# EAGLE board kvetinac_driver_board (EAGLE 6.3)
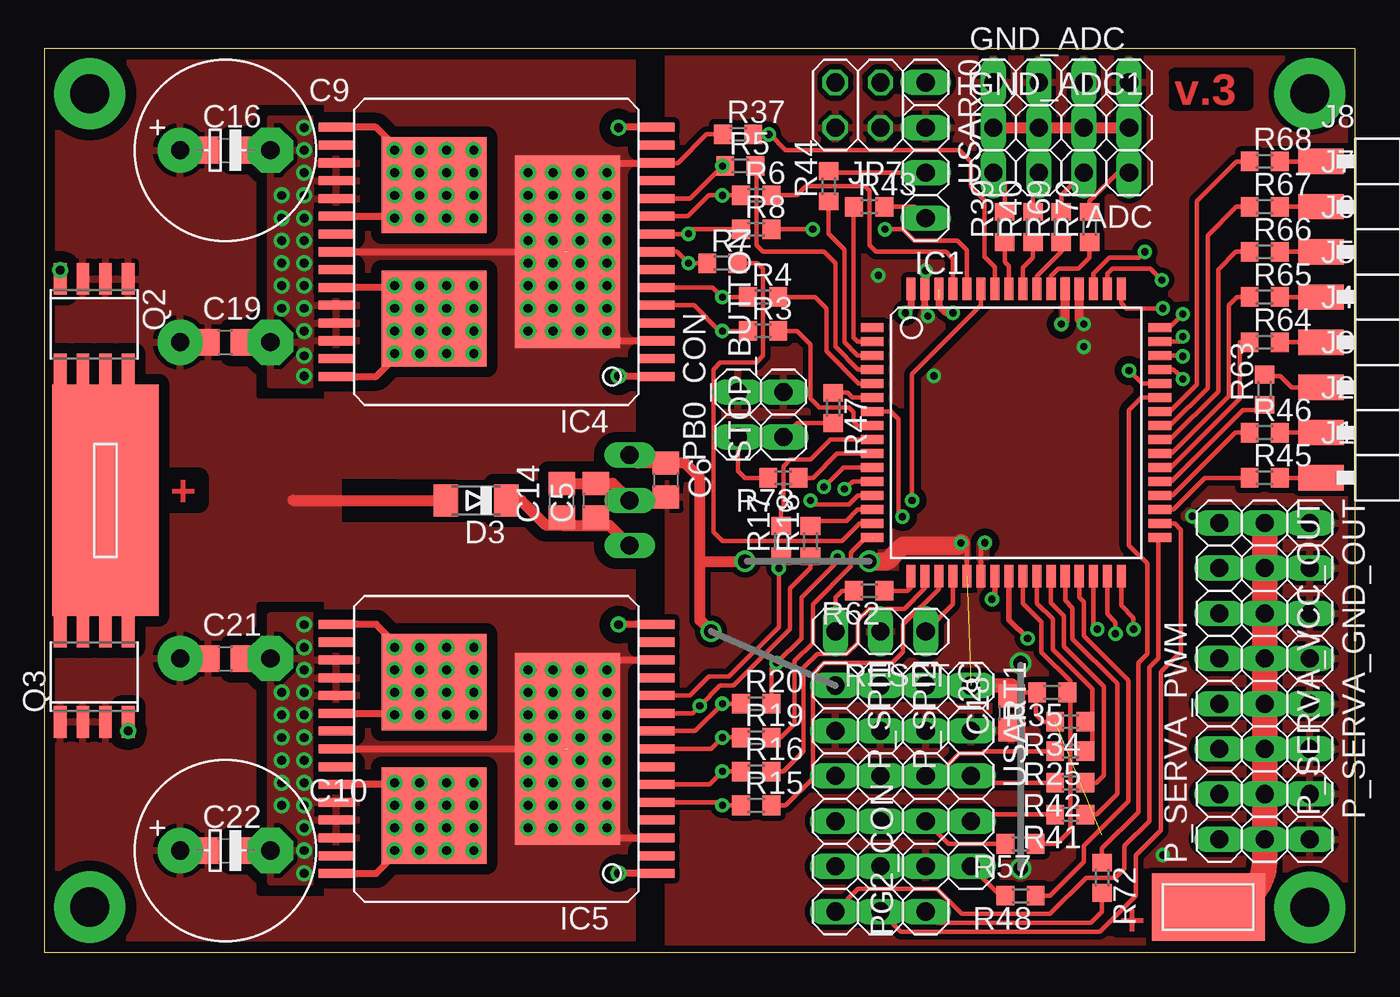
[diagram p0: board, top side]
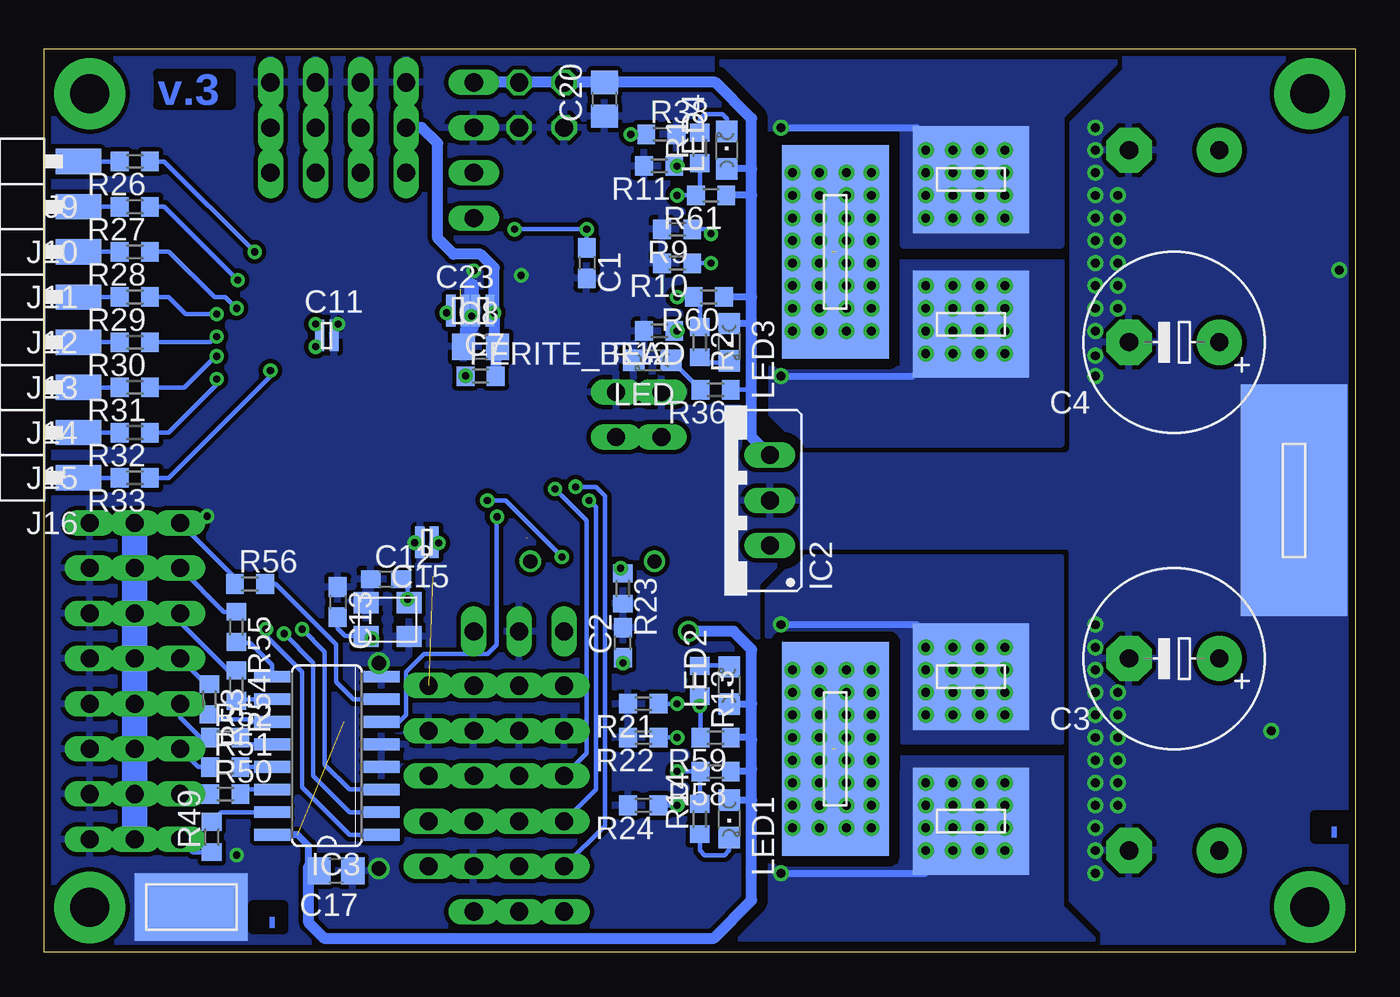
[diagram p1: board, bottom side, seen from below]

Size 73.66 x 50.8 mm. Coordinates in mm from the lower left corner, seen from the top.
Outline: 0,0 73.66,0 73.66,50.8 0,50.8 0,0
Copper layers (1*16): Top 0.035mm / dielectric 1.5mm / Bottom 0.035mm
Design rules "default *": minimum track width 0.2mm, minimum drill 0.4mm, track to track 0.2mm, track to pad 0.2mm, pad to pad 0.2mm, via to via 0.2mm, smd to smd 0mil, copper to edge 0.4mm, drill to drill 0.4mm, minimum pad ring 0.2mm, minimum via ring 0.2mm, stop-mask expansion 2mil, vias tented up to drill 0.4mm, thermal gap 10mil

## Footprints (pad centres in the part's own frame; a part is rotated, then mirrored left to right if it is on the bottom)
CABEL_SMD = smd 13 x 6: P$1 0,0
1X04 = drill 1.016 long: 1 -3.81,0; 2 -1.27,0; 3 1.27,0; 4 3.81,0
C0603 = smd 1.1 x 1: 1 -0.85,0; 2 0.85,0
E5-10,5 = drill 1.016 pad 2.54: + -2.54,0 | drill 1.016 pad 2.54 octagon: - 2.54,0
C0805 = smd 1.3 x 1.5: 1 -0.95,0; 2 0.95,0
C0306 = smd 0.508 x 1.778: 1 -0.401,0; 2 0.401,0
MINIMELF = smd 1.4 x 1.8: A 1.7,0; C -1.7,0
R0603 = smd 1 x 1.1: 1 -0.85,0; 2 0.85,0
TQFP64 = smd 1.27 x 0.508: 1 -8.077,5.905; 2 -8.077,5.118; 3 -8.077,4.331; 4 -8.077,3.543; 5 -8.077,2.756; 6 -8.077,1.968; 7 -8.077,1.181; 8 -8.077,0.394; 9 -8.077,-0.394; 10 -8.077,-1.181; 11 -8.077,-1.968; 12 -8.077,-2.756; 13 -8.077,-3.543; 14 -8.077,-4.331; 15 -8.077,-5.118; 16 -8.077,-5.905; 33 8.077,-5.905; 34 8.077,-5.118; 35 8.077,-4.331; 36 8.077,-3.543; 37 8.077,-2.756; 38 8.077,-1.968; 39 8.077,-1.181; 40 8.077,-0.394; 41 8.077,0.394; 42 8.077,1.181; 43 8.077,1.968; 44 8.077,2.756; 45 8.077,3.543; 46 8.077,4.331; 47 8.077,5.118; 48 8.077,5.905 | smd 0.508 x 1.27: 17 -5.905,-8.077; 18 -5.118,-8.077; 19 -4.331,-8.077; 20 -3.543,-8.077; 21 -2.756,-8.077; 22 -1.968,-8.077; 23 -1.181,-8.077; 24 -0.394,-8.077; 25 0.394,-8.077; 26 1.181,-8.077; 27 1.968,-8.077; 28 2.756,-8.077; 29 3.543,-8.077; 30 4.331,-8.077; 31 5.118,-8.077; 32 5.905,-8.077; 49 5.905,8.077; 50 5.118,8.077; 51 4.331,8.077; 52 3.543,8.077; 53 2.756,8.077; 54 1.968,8.077; 55 1.181,8.077; 56 0.394,8.077; 57 -0.394,8.077; 58 -1.181,8.077; 59 -1.968,8.077; 60 -2.756,8.077; 61 -3.543,8.077; 62 -4.331,8.077; 63 -5.118,8.077; 64 -5.905,8.077
78XXS = drill 1.016 long: GND 0,-2.54; IN -2.54,-2.54; OUT 2.54,-2.54
SO16 = smd 0.66 x 2.032: 1 -4.445,-3.073; 2 -3.175,-3.073; 3 -1.905,-3.073; 4 -0.635,-3.073; 5 0.635,-3.073; 6 1.905,-3.073; 7 3.175,-3.073; 8 4.445,-3.073; 9 4.445,3.073; 10 3.175,3.073; 11 1.905,3.073; 12 0.635,3.073; 13 -0.635,3.073; 14 -1.905,3.073; 15 -3.175,3.073; 16 -4.445,3.073
MULTIPOWERSO-30 = smd 0.508 x 2: 1 -7,-9; 2 -6,-9; 3 -5,-9; 4 -4,-9; 5 -3,-9; 6 -2,-9; 7 -1,-9; 8 0,-9; 9 1,-9; 10 2,-9; 11 3,-9; 12 4,-9; 13 5,-9; 14 6,-9; 15 7,-9; 16 7,9; 17 6,9; 18 5,9; 19 4,9; 20 3,9; 21 2,9; 22 1,9; 23 0,9; 24 -1,9; 25 -2,9; 26 -3,9; 27 -4,9; 28 -5,9; 29 -6,9; 30 -7,9 | smd 5.4 x 5.9: OUTA -3.75,3.5; OUTB 3.75,3.5 | smd 10.8 x 5.9: VCC 0,-4
1X01/SMD = smd 1.422 x 2.54: 1 0,-1.27
2X02 = drill 1.016 octagon: 1 -1.27,-1.27; 2 -1.27,1.27; 3 1.27,-1.27; 4 1.27,1.27
CHIPLED_0805 = smd 1.2 x 1.2: A 0,-1.05; C 0,1.05
CABEL_SMD_6.5*6MM = smd 6.5 x 6: P$1 0,0
1X08 = drill 1.016 long: 1 -8.89,0; 2 -6.35,0; 3 -3.81,0; 4 -1.27,0; 5 1.27,0; 6 3.81,0; 7 6.35,0; 8 8.89,0
1X06 = drill 1.016 long: 1 -6.35,0; 2 -3.81,0; 3 -1.27,0; 4 1.27,0; 5 3.81,0; 6 6.35,0
1X02 = drill 1.016 long: 1 -1.27,0; 2 1.27,0
ABM8 = smd 1.4 x 1.2: GND$1 -1.2,0.95; GND$2 1.2,-0.95; Q$1 -1.2,-0.95; Q$2 1.2,0.95
SO08-IRF = smd 0.72 x 1.78: 1 -1.905,-2.543; 2 -0.635,-2.543; 3 0.635,-2.543; 4 1.905,-2.543; 5 1.905,2.543; 6 0.635,2.543; 7 -0.635,2.543; 8 -1.905,2.543
1X03 = drill 1.016 long: 1 -2.54,0; 2 0,0; 3 2.54,0
1X05 = drill 1.016 long: 1 -5.08,0; 2 -2.54,0; 3 0,0; 4 2.54,0; 5 5.08,0
CABEL_SMD_0.25*0.15 = smd 6.35 x 3.81: P$1 0,0
CABEL_SMD_12*6MM = smd 12 x 6: P$1 0,0

## Placement (x,y rotation side)
0V  CABEL_SMD  [CABEL_SMD]  3.43,25.4 90 bottom
ADC  [1X04]  57.15,43.81 180 top
C1  33nF  [C0603]  43.18,38.73 270 bottom
C2  33nF  [C0603]  41.15,17.4 90 bottom
C3  1500uF/25V  [E5-10,5]  10.16,16.51 180 bottom
C4  1500uF/25V  [E5-10,5]  10.16,34.29 180 bottom
C5  4,7uF/25V  [C0805]  30.99,25.4 90 top
C6  4,7uF/6,3V  [C0805]  34.92,26.54 270 top
C7  100nF/6,3V  [C0306]  49.02,36.07 180 bottom
C8  4,7uF/6,3V  [C0805]  49.15,34.04 0 bottom
C9  1500uF/25V  [E5-10,5]  10.16,45.09 0 top
C10  1500uF/25V  [E5-10,5]  10.16,5.71 0 top
C11  100nF/6,3V  [C0306]  57.78,34.67 0 bottom
C12  18pF/6,3V  [C0603]  54.47,20.97 0 bottom
C13  18pF/6,3V  [C0603]  57.18,19.68 270 bottom
C14  4,7uF/25V  [C0805]  29.08,25.4 90 top
C15  100nF/6,3V  [C0306]  52.16,23.04 180 bottom
C16  4,7uF/25V  [C0805]  10.16,45.09 0 top
C17  4,7uF/6,3V  [C0805]  57.28,4.57 180 bottom
C18  4,7uF/6,3V  [C0805]  54.36,13.46 90 top
C19  4,7uF/25V  [C0805]  10.16,34.29 0 top
C20  4,7uF/6,3V  [C0805]  42.18,47.94 90 bottom
C21  4,7uF/25V  [C0805]  10.16,16.51 0 top
C22  4,7uF/25V  [C0805]  10.16,5.71 0 top
C23  100nF/6,3V  [C0306]  50.42,36.07 0 bottom
D3  1A/25+V  [MINIMELF]  24.26,25.4 180 top
FERITE_BEAD  10uH  [R0603]  49.15,32.38 0 bottom
GND_ADC  [1X04]  57.15,48.9 0 top
GND_ADC1  [1X04]  57.15,46.35 0 top
I2C  [1X04]  49.53,11.18 270 top
IC1  MEGA128-A  [TQFP64]  54.61,29.21 0 top
IC2  [78XXS]  35.43,25.4 90 bottom
IC3  74HC238D  [SO16]  57.78,11.05 90 bottom
IC4  VNH2SP30  [MULTIPOWERSO-30]  25.4,39.37 90 top
IC5  VNH2SP30  [MULTIPOWERSO-30]  25.4,11.43 90 top
J1  PINHD-1X1SMD2.4MM  [1X01/SMD]  73.03,26.67 270 top
J2  PINHD-1X1SMD2.4MM  [1X01/SMD]  73.03,29.21 270 top
J3  PINHD-1X1SMD2.4MM  [1X01/SMD]  73.03,31.75 270 top
J4  PINHD-1X1SMD2.4MM  [1X01/SMD]  73.03,34.29 270 top
J5  PINHD-1X1SMD2.4MM  [1X01/SMD]  73.03,36.83 270 top
J6  PINHD-1X1SMD2.4MM  [1X01/SMD]  73.03,39.37 270 top
J7  PINHD-1X1SMD2.4MM  [1X01/SMD]  73.03,41.91 270 top
J8  PINHD-1X1SMD2.4MM  [1X01/SMD]  73.03,44.45 270 top
J9  PINHD-1X1SMD2.4MM  [1X01/SMD]  73.03,44.45 90 bottom
J10  PINHD-1X1SMD2.4MM  [1X01/SMD]  73.03,41.91 90 bottom
J11  PINHD-1X1SMD2.4MM  [1X01/SMD]  73.03,39.37 90 bottom
J12  PINHD-1X1SMD2.4MM  [1X01/SMD]  73.03,36.83 90 bottom
J13  PINHD-1X1SMD2.4MM  [1X01/SMD]  73.03,34.29 90 bottom
J14  PINHD-1X1SMD2.4MM  [1X01/SMD]  73.03,31.75 90 bottom
J15  PINHD-1X1SMD2.4MM  [1X01/SMD]  73.03,29.21 90 bottom
J16  PINHD-1X1SMD2.4MM  [1X01/SMD]  73.03,26.67 90 bottom
JP7  +5V  [2X02]  45.72,47.62 180 top
LED  GREEN  [CHIPLED_0805]  39.5,33.27 90 bottom
LED1  RED  [CHIPLED_0805]  35.18,7.49 180 bottom
LED2  RED  [CHIPLED_0805]  35.18,14.99 0 bottom
LED3  RED  [CHIPLED_0805]  35.18,34.29 180 bottom
LED4  RED  [CHIPLED_0805]  35.31,45.09 0 bottom
OUTA_1  CABEL_SMDCABEL_SMD_6.5*6MM  [CABEL_SMD_6.5*6MM]  21.59,35.31 180 bottom
OUTA_2  CABEL_SMDCABEL_SMD_6.5*6MM  [CABEL_SMD_6.5*6MM]  21.59,7.37 0 bottom
OUTB_1  CABEL_SMDCABEL_SMD_6.5*6MM  [CABEL_SMD_6.5*6MM]  21.59,43.43 0 bottom
OUTB_2  CABEL_SMDCABEL_SMD_6.5*6MM  [CABEL_SMD_6.5*6MM]  21.59,15.49 180 bottom
P_SERVA_GND_OUT  [1X08]  71.12,15.24 270 top
P_SERVA_PWM  [1X08]  66.04,15.24 90 top
P_SERVA_VCC_OUT  [1X08]  68.58,15.24 270 top
P_SPI1  [1X06]  44.45,8.64 270 top
P_SPI2  [1X06]  46.99,8.64 270 top
PB0_CON  [1X02]  38.99,30.23 90 top
PG2_CON  [1X02]  49.53,3.56 90 top
Q1  16MHz  [ABM8]  54.37,18.7 180 bottom
Q2  TPCA8128SO8  [SO08-IRF]  2.79,35.31 180 top
Q3  TPCA8128SO8  [SO08-IRF]  2.79,15.49 0 top
R1  2k2  [R0603]  36.83,45.21 90 bottom
R2  2k2  [R0603]  36.83,34.29 270 bottom
R3  1k  [R0603]  40.39,34.92 0 top
R4  1k  [R0603]  40.39,36.83 0 top
R5  1k  [R0603]  39.12,44.2 0 top
R6  1k  [R0603]  40.01,42.55 0 top
R7  1k  [R0603]  38.1,38.73 0 top
R8  10k  [R0603]  40.01,40.64 0 top
R9  1k5  [R0603]  38.1,40.64 180 bottom
R10  22k  [R0603]  38.1,38.73 180 bottom
R11  22k  [R0603]  39.12,44.2 180 bottom
R12  22k  [R0603]  39.12,34.92 180 bottom
R13  2k2  [R0603]  36.83,15.24 270 bottom
R14  2k2  [R0603]  36.83,7.49 90 bottom
R15  1k  [R0603]  40.01,8.26 0 top
R16  1k  [R0603]  40.01,10.16 0 top
R17  1k  [R0603]  41.4,23.11 90 top
R18  1k  [R0603]  43.05,23.11 90 top
R19  1k  [R0603]  40.01,12.06 0 top
R20  10k  [R0603]  40.01,13.97 0 top
R21  1k5  [R0603]  40.01,13.97 180 bottom
R22  22k  [R0603]  40.01,12.06 180 bottom
R23  22k  [R0603]  41.15,20.45 270 bottom
R24  22k  [R0603]  40.01,8.26 180 bottom
R25  220  [R0603]  57.66,11.3 180 top
R26  220  [R0603]  68.58,44.45 180 bottom
R27  220  [R0603]  68.58,41.91 180 bottom
R28  220  [R0603]  68.58,39.37 180 bottom
R29  220  [R0603]  68.58,36.83 180 bottom
R30  220  [R0603]  68.58,34.29 180 bottom
R31  220  [R0603]  68.58,31.75 180 bottom
R32  220  [R0603]  68.58,29.21 180 bottom
R33  220  [R0603]  68.58,26.67 180 bottom
R34  4k7  [R0603]  57.66,12.95 180 top
R35  4k7  [R0603]  56.64,14.61 180 top
R36  1k  [R0603]  35.94,31.62 180 bottom
R37  33k  [R0603]  38.99,45.97 0 top
R38  10k  [R0603]  38.99,45.97 0 bottom
R39  220  [R0603]  53.98,40.77 90 top
R40  220  [R0603]  55.56,40.77 90 top
R41  220  [R0603]  57.66,7.75 180 top
R42  220  [R0603]  57.66,9.53 180 top
R43  220  [R0603]  46.35,41.91 0 top
R44  220  [R0603]  44.07,43.05 90 top
R45  220  [R0603]  68.58,26.67 0 top
R46  220  [R0603]  68.58,29.21 0 top
R47  220  [R0603]  44.32,30.6 270 top
R48  220  [R0603]  54.86,3.17 180 top
R49  470R  [R0603]  64.26,6.48 90 bottom
R50  470R  [R0603]  63.5,8.89 0 bottom
R51  470R  [R0603]  63.5,10.41 0 bottom
R52  470R  [R0603]  63.5,12.06 0 bottom
R53  470R  [R0603]  64.39,14.22 270 bottom
R54  470R  [R0603]  62.87,14.99 270 bottom
R55  470R  [R0603]  62.87,18.29 270 bottom
R56  470R  [R0603]  62.1,20.7 0 bottom
R57  220  [R0603]  54.86,6.1 180 top
R58  3k3  [R0603]  35.94,10.16 180 bottom
R59  3k3  [R0603]  35.94,12.06 180 bottom
R60  3k3  [R0603]  36.32,36.83 180 bottom
R61  3k3  [R0603]  36.2,42.55 180 bottom
R62  220  [R0603]  46.35,20.32 180 top
R63  220  [R0603]  68.58,31.62 90 top
R64  220  [R0603]  68.58,34.29 0 top
R65  220  [R0603]  68.58,36.83 0 top
R66  220  [R0603]  68.58,39.37 0 top
R67  220  [R0603]  68.58,41.91 0 top
R68  220  [R0603]  68.58,44.45 0 top
R69  220  [R0603]  57.15,40.77 90 top
R70  220  [R0603]  58.74,40.77 90 top
R72  220  [R0603]  59.44,4.19 270 top
R73  220  [R0603]  41.53,26.67 180 top
RESET  [1X03]  46.99,18.03 180 top
STOP_BUTTON  [1X02]  41.53,30.23 90 top
USART0  [1X04]  49.53,45.09 270 top
USART1  [1X05]  52.07,9.91 270 top
VCC  CABEL_SMD  [CABEL_SMD]  3.43,25.4 270 top
VCC1  CABEL_SMD0.2*0.15  [CABEL_SMD_0.25*0.15]  65.41,2.54 0 top
VCC2  CABEL_SMD0.2*0.15  [CABEL_SMD_0.25*0.15]  65.41,2.54 0 bottom
VCCA  CABEL_SMDCABEL_SMD_12*6MM  [CABEL_SMD_12*6MM]  29.21,39.37 270 bottom
VCCB  CABEL_SMDCABEL_SMD_12*6MM  [CABEL_SMD_12*6MM]  29.21,11.43 270 bottom

## Library data of the parts
0V OUTA_1 OUTA_2 OUTB_1 OUTB_2 VCC VCC1 VCC2 VCCA VCCB = cabel_smd
ADC GND_ADC GND_ADC1 I2C JP7 P_SERVA_GND_OUT P_SERVA_PWM P_SERVA_VCC_OUT P_SPI1 P_SPI2 PB0_CON PG2_CON RESET STOP_BUTTON USART0 USART1 = pinhead
C1-C6 C8-C10 C12-C14 C16-C22 FERITE_BEAD R1-R70 R72 R73 = rcl
C7 C11 C15 C23 = rcl_upravena
D3 = diode
IC1 = avr
IC2 = v-reg
IC3 = 74
IC4 IC5 Q2 Q3 = vacha
J1-J16 = pinhead_smd
LED LED1-LED4 = led
Q1 = crystal

## Nets
+5V: C6.1 C11.1 C15.1 C17.2 C18.2 C20.2 FERITE_BEAD.1 I2C.1 IC1.21 IC1.52 IC2.OUT IC3.16 JP7.1 JP7.3 LED1.A LED2.A LED3.A LED4.A P_SPI1.1 P_SPI2.1 R34.2 R35.2 R36.1 R58.1 R59.1 R60.1 R61.1 USART0.1 USART1.1
A0: IC1.51 R26.1
A1: IC1.50 R27.1
A2: IC1.49 R28.1
A3: IC1.48 R29.1
A4: IC1.47 R30.1
A5: IC1.46 R31.1
A6: IC1.45 R32.1
A7: IC1.44 R33.1
ADC4: IC1.57 R39.1
ADC5: IC1.56 R40.1
ADC6: IC1.55 R69.1
ADC7: IC1.54 R70.1
AREF: C23.1 IC1.62
BAT: IC1.58 R37.2 R38.1
C0: IC1.35 R45.1
C1: IC1.36 R46.1
C2: IC1.37 R63.1
C3: IC1.38 R64.1
C4: IC1.39 R65.1
C5: IC1.40 R66.1
C6: IC1.41 R67.1
C7: IC1.42 R68.1
CS_L: C1.1 IC1.60 R8.2
CS_R: C2.1 IC1.59 R20.2
DIAG_LA: IC1.5 R4.2
DIAG_LB: IC1.61 R6.2
DIAG_RA: IC1.18 R16.2
DIAG_RB: IC1.14 R18.2
GND: 0V.P$1 C1.2 C2.2 C3.- C4.- C5.2 C6.2 C7.2 C8.1 C9.- C10.- C11.2 C12.1 C13.1 C14.2 C15.2 C16.2 C17.1 C18.1 C19.2 C20.1 C21.2 C22.2 C23.2 GND_ADC.1 GND_ADC.2 GND_ADC.3 GND_ADC.4 I2C.2 IC1.22 IC1.53 IC1.63 IC2.GND IC3.4 IC3.5 IC3.8 IC4.18 IC4.19 IC4.20 IC4.26 IC4.27 IC4.28 IC5.18 IC5.19 IC5.20 IC5.26 IC5.27 IC5.28 JP7.2 JP7.4 LED.C P_SERVA_GND_OUT.1 P_SERVA_GND_OUT.2 P_SERVA_GND_OUT.3 P_SERVA_GND_OUT.4 P_SERVA_GND_OUT.5 P_SERVA_GND_OUT.6 P_SERVA_GND_OUT.7 P_SERVA_GND_OUT.8 P_SPI1.2 P_SPI2.2 PB0_CON.2 PG2_CON.2 Q1.GND$1 Q1.GND$2 Q2.4 Q3.4 R9.2 R10.2 R11.2 R12.2 R21.2 R22.2 R23.2 R24.2 R38.2 RESET.2 STOP_BUTTON.2 USART0.2 USART1.2 VCC2.P$1
I2C_CL: IC1.25 R35.1 R57.1
I2C_DA: IC1.26 R25.1 R34.1
IN_LA: IC1.8 R3.2
IN_LB: IC1.4 R5.2
IN_RA: IC1.19 R15.2
IN_RB: IC1.9 R17.2
MISO: IC1.13 P_SPI1.4 P_SPI2.4
MOSI: IC1.12 P_SPI1.3 P_SPI2.3
N$1: IC4.5 R3.1 R12.1
N$2: IC5.10 R13.2 R18.1 R59.2
N$3: IC4.11 R5.1 R11.1
N$4: IC5.6 R14.2 R16.1 R58.2
N$5: IC4.8 R7.1 R10.1
N$6: IC4.9 R8.1 R9.1
N$7: IC4.6 R2.1 R4.1 R60.2
N$8: C12.2 IC1.23 Q1.Q$1
N$9: C13.2 IC1.24 Q1.Q$2
N$11: IC5.5 R15.1 R24.1
N$12: IC4.10 R1.1 R6.1 R61.2
N$13: IC5.11 R17.1 R23.1
N$14: LED1.C R14.1
N$15: IC5.8 R19.1 R22.1
N$16: IC5.9 R20.1 R21.1
N$18: PG2_CON.1 R72.2
N$19: ADC.3 R40.2
N$20: LED2.C R13.1
N$21: LED.A R36.2
N$22: J9.1 R26.2
N$23: J10.1 R27.2
N$24: J11.1 R28.2
N$25: J12.1 R29.2
N$26: J13.1 R30.2
N$27: J14.1 R31.2
N$28: J15.1 R32.2
N$29: J16.1 R33.2
N$30: R41.2 USART1.4
N$31: R42.2 USART1.3
N$32: R43.2 USART0.4
N$33: R44.2 USART0.3
N$34: ADC.4 R39.2
N$35: R48.2 USART1.5
N$36: R47.2 STOP_BUTTON.1
N$37: LED3.C R2.2
N$38: LED4.C R1.2
N$39: IC3.15 R49.2
N$40: PB0_CON.1 R73.2
N$41: IC3.14 R50.2
N$42: IC3.13 R51.2
N$43: IC3.12 R52.2
N$44: IC3.11 R53.2
N$45: IC3.10 R54.2
N$46: IC3.9 R55.2
N$47: IC3.7 R56.2
N$48: P_SERVA_PWM.8 R56.1
N$49: P_SERVA_PWM.7 R55.1
N$50: P_SERVA_PWM.6 R54.1
N$51: P_SERVA_PWM.5 R53.1
N$52: P_SERVA_PWM.4 R52.1
N$53: P_SERVA_PWM.3 R51.1
N$54: P_SERVA_PWM.2 R50.1
N$55: P_SERVA_PWM.1 R49.1
N$56: R62.2 RESET.3
N$57: I2C.3 R25.2
N$58: ADC.2 R69.2
N$59: ADC.1 R70.2
N$60: I2C.4 R57.2
N$62: J1.1 R45.2
N$66: Q2.5 Q2.6 Q2.7 Q2.8 Q3.5 Q3.6 Q3.7 Q3.8 VCC.P$1
N$67: J2.1 R46.2
N$68: J3.1 R63.2
N$69: J4.1 R64.2
N$70: J5.1 R65.2
N$71: J6.1 R66.2
N$72: J7.1 R67.2
N$73: J8.1 R68.2
N$88: C5.1 C14.1 D3.C IC2.IN
OUTA_1: IC4.1 IC4.25 IC4.30 IC4.OUTA OUTA_1.P$1
OUTA_2: IC5.1 IC5.25 IC5.30 IC5.OUTA OUTA_2.P$1
OUTB_1: IC4.15 IC4.16 IC4.21 IC4.OUTB OUTB_1.P$1
OUTB_2: IC5.15 IC5.16 IC5.21 IC5.OUTB OUTB_2.P$1
PB0: IC1.10 R73.1
PG2: IC1.43 R72.1
PWM_1: IC1.17 R62.1
PWM_L: IC1.15 R7.2
PWM_R: IC1.16 R19.2
RESET: IC1.20 RESET.1
RXD: IC1.2 R43.1
RXD1: IC1.27 R42.1
SA0: IC1.30 IC3.3
SA1: IC1.31 IC3.2
SA2: IC1.32 IC3.1
SCK: IC1.11 P_SPI1.5 P_SPI2.5
SEN: IC1.7 IC3.6
SERVA_VCC: P_SERVA_VCC_OUT.1 P_SERVA_VCC_OUT.2 P_SERVA_VCC_OUT.3 P_SERVA_VCC_OUT.4 P_SERVA_VCC_OUT.5 P_SERVA_VCC_OUT.6 P_SERVA_VCC_OUT.7 P_SERVA_VCC_OUT.8 VCC1.P$1
SPI_SEL1: IC1.34 P_SPI2.6
SPI_SEL2: IC1.33 P_SPI1.6
STOP: IC1.6 R47.1
TXD: IC1.3 R44.1
TXD1: IC1.28 R41.1
USART1_PIN: IC1.29 R48.1
VCC: C3.+ C4.+ C9.+ C10.+ C16.1 C19.1 C21.1 C22.1 D3.A IC4.3 IC4.13 IC4.23 IC4.VCC IC5.3 IC5.13 IC5.23 IC5.VCC Q2.1 Q2.2 Q2.3 Q3.1 Q3.2 Q3.3 R37.1 VCCA.P$1 VCCB.P$1
VPP: C7.1 C8.2 FERITE_BEAD.2 GND_ADC1.1 GND_ADC1.2 GND_ADC1.3 GND_ADC1.4 IC1.64

## Tracks (layer width: path | path; a pad name or v marks a point on that pad's centre or on a via)
+5V  (via drill 0.4, 0.8)  (2 unrouted)
  Top 0.254: R34.2 56.13,12.95 55.73,13.36 55.73,14.48 R35.2 54.36,14.61 C18.2 | IC1.21 51.85,23 v51.51,23
  Top 0.508: IC1.52 58.15,35.57 v58.42,35.31
  Top 0.61: 54.36,14.99 54.36,14.61 | IC2.OUT 33.34,27.49 C6.1 36.01,27.49 36.83,26.67 36.83,21.84 | 36.83,21.84 36.83,18.67 v37.47,18.03 | v39.37,21.97 36.96,21.97 36.83,21.84
  Top 0.813: 54.36,14.99 USART1.1 I2C.1 P_SPI2.1 P_SPI1.1
  Top 1.016: v46.35,21.97 47.37,21.97 48.26,22.86 51.37,22.86 v51.51,23
  Bottom 0.254: 51.8,22.97 51.8,23 v51.51,23 | R36.1 34.16,31.62 33.91,31.37
  Bottom 0.406: 33.91,36.83 R60.1 | 33.91,35.34 LED3.A | 33.91,44.03 LED4.A | 33.91,42.55 R61.1 | 33.91,8.54 LED1.A | LED2.A 34.07,13.94 33.91,13.97 | R59.1 34.16,12.06 33.91,11.94 | R58.1 34.16,10.16 33.91,10.29 | IC3.16 59.44,6.6 58.8,5.97 58.8,4.83 58.55,4.57 C17.2 | C20.2 42.42,48.89 42.42,48.9
  Bottom 0.508: v58.42,35.31 58.19,35.07 C11.1 58.19,34.27 | 51.8,22.97 C15.1
  Bottom 0.61: IC2.OUT 33.91,28.96 33.91,31.37 33.91,35.34 33.91,36.83 33.91,42.55 33.91,44.03 33.91,46.86 35.94,48.9 42.42,48.9 JP7.3 JP7.1 USART0.1 | v37.47,18.03 34.92,18.03 33.91,17.02 33.91,13.97 33.91,11.94 33.91,10.29 33.91,8.54 33.91,2.92 36.07,0.76 57.91,0.76 58.8,1.65 58.8,4.83 | v49.99,32.4 50.02,32.4 FERITE_BEAD.1
  other vias: 58.42,34.04
  pour Top (isolate 0.406): 61.59,36.83 46.99,36.83 46.99,21.59 61.59,21.59
A0  (via drill 0.4)
  Top 0.254: IC1.51 58.94,38.14 59.85,39.05 61.53,39.05 v61.85,39.37
  Bottom 0.254: v61.85,39.37 66.93,44.45 R26.1
A1  (via drill 0.4)
  Top 0.254: IC1.50 59.73,38.14 60.01,38.42 62.17,38.42 v62.8,37.78
  Bottom 0.254: v62.8,37.78 66.93,41.91 R27.1
A2  (via drill 0.4)
  Top 0.254: v62.87,36.2 60.8,36.2 60.52,36.48 IC1.49
  Bottom 0.254: R28.1 66.67,39.37 64.1,36.83 63.53,36.83 63.5,36.83 v62.87,36.2
A3  (via drill 0.4)
  Top 0.254: IC1.48 63.21,35.12 v63.98,35.88
  Bottom 0.254: R29.1 66.67,36.83 65.72,35.88 v63.98,35.88
A4  (via drill 0.4)
  Top 0.254: IC1.47 63.78,34.33 v63.98,34.61
  Bottom 0.254: R30.1 64.36,34.29 64.04,34.61 v63.98,34.61
A5  (via drill 0.4)
  Top 0.254: IC1.46 63.77,33.54 v63.98,33.5
  Bottom 0.254: R31.1 65.82,31.75 64.07,33.5 v63.98,33.5
A6  (via drill 0.4)
  Top 0.254: IC1.45 63.45,32.75 63.66,32.54 v63.98,32.23
  Bottom 0.254: R32.1 66.67,29.21 63.98,31.91 v63.98,32.23
A7  (via drill 0.4)
  Top 0.254: IC1.44 61.7,31.97 v60.96,32.7
  Bottom 0.254: R33.1 66.67,26.67 60.96,32.38 v60.96,32.7
ADC4
  Top 0.254: IC1.57 54.22,38.56 53.98,38.8 R39.1
ADC5
  Top 0.254: IC1.56 55,38.49 55.56,39.05 R40.1
ADC6
  Top 0.254: IC1.55 55.79,38.01 57.15,39.37 R69.1
ADC7
  Top 0.254: IC1.54 56.58,38.01 56.99,38.42 58.1,38.42 58.74,39.05 R70.1
AREF  (via drill 0.4)  (1 unrouted)
  Top 0.406: 50.28,36.72 50.28,36.34 50.67,35.94 v51.05,35.94
  Bottom 0.406: v51.05,35.94 50.95,35.94 C23.1
BAT  (via drill 0.4)
  Top 0.254: R38.1 v40.7,45.97 40.77,45.97 41.66,45.09 51.44,45.09 52.07,44.45 52.07,43.05 52.83,42.29 52.83,39.12 53.43,38.52 IC1.58
  Bottom 0.254: R38.1 v40.7,45.97
C0
  Top 0.254: R45.1 65.22,26.67 63.45,24.88 IC1.35
C1
  Top 0.254: R46.1 66.93,29.21 63.39,25.67 IC1.36
C2
  Top 0.254: IC1.37 63.32,26.45 67.35,30.48 68.58,30.48 R63.1
C3
  Top 0.254: IC1.38 63.31,27.24 67.18,31.11 67.18,34.29 R64.1
C4
  Top 0.254: R65.1 67.02,36.83 66.58,36.39 66.58,34.89 66.58,31.27 63.34,28.03 IC1.39
C5
  Top 0.254: R66.1 66.96,39.37 65.98,38.39 65.98,31.53 63.27,28.82 IC1.40
C6
  Top 0.254: R67.1 66.99,41.91 65.37,40.29 65.37,31.72 63.26,29.6 IC1.41
C7
  Top 0.254: IC1.42 63.25,30.39 64.77,31.91 64.77,42.23 66.99,44.45 R68.1
CS_L  (via drill 0.4)
  Top 0.254: R8.2 v43.18,40.64 | v47.24,40.64 48.26,40.64 48.9,40.01 51.31,40.01 51.85,39.46 IC1.60
  Bottom 0.254: C1.1 v43.18,40.64 v47.24,40.64
CS_R  (via drill 0.4)
  Top 0.254: R20.2 40.85,15.96 v41.15,16.26 42.55,17.65 42.55,19.94 44.58,21.97 v44.58,22.23 | IC1.59 52.64,36.39 48.77,32.51 v48.77,25.4
  Bottom 0.254: v41.15,16.26 C2.1 | v48.77,25.4 47.75,25.4 v44.58,22.23
DIAG_LA
  Top 0.254: IC1.5 45.76,31.97 43.94,33.78 43.94,36.2 43.31,36.83 R4.2
DIAG_LB
  Top 0.254: R6.2 42.29,42.55 42.8,43.05 46.1,43.05 46.35,42.8 46.35,39.75 46.74,39.37 50.67,39.37 51.07,38.98 IC1.61
DIAG_RA
  Top 0.254: IC1.18 49.49,20.47 48.32,19.3 46.35,19.3 45.72,18.67 45.72,17.4 45.09,16.76 43.43,16.76 42.67,16 42.67,11.3 41.53,10.16 R16.2
DIAG_RB
  Top 0.254: R18.2 43.41,24.24 45.07,24.24 45.71,24.88 IC1.14
GND  (via drill 0.4, 0.5, 0.8)
  Top 0.254: IC1.22 52.64,23.02 v52.86,23.02 | v4.7,12.45 Q3.4 | 1.02,38.48 v0.89,38.35 Q2.4
  Top 0.406: IC1.63 49.49,35.93 v49.66,35.77 | C16.2 C9.- | C19.2 C4.- | C21.2 C3.- | C22.2 C10.-
  Top 0.508: 57.37,37.01 IC1.53 57.37,35.52 v57.15,35.31
  Top 0.61: C14.2 C5.2 31.94,26.35 IC2.GND 34.73,25.4 C6.2
  Bottom 0.254: v52.86,23.02 52.6,23.02 C15.2 | R11.2 39.75,44.54
  Bottom 0.406: IC3.8 54.71,16.23 v54.86,16.26 | C7.2 49.48,36.07 v49.66,35.77 49.83,36.07 C23.2
  Bottom 0.508: v57.15,35.31 57.38,35.07 C11.2
  Bottom 0.813: 49.66,37.47 49.66,35.18 49.91,34.92 49.91,34.67
  other vias: 14.61,45.09 14.61,43.81 14.61,42.55 14.61,41.27 13.34,41.27 13.34,42.55 14.61,37.47 14.61,36.2 14.61,34.92 14.61,33.53 13.34,36.2 13.34,37.47 14.61,9.53 14.61,8.26 14.61,6.99 14.61,5.71 13.34,8.26 13.34,9.53 14.61,17.14 14.61,15.88 14.61,14.61 14.61,13.34 13.34,13.34 13.34,14.61 14.61,46.35 14.61,4.45 54.86,4.7 14.61,40.01 14.61,38.73 13.34,38.73 13.34,40.01 14.61,12.06 14.61,10.79 13.34,10.79 13.34,12.06 14.61,18.41 14.61,32.38 64.52,24.51 62.87,5.46 46.86,38.05 49.53,38.31
  pour Bottom (isolate 0.254, rank 3): 0,50.8 0,0 73.66,0 73.66,50.8
  pour Top (isolate 0.305, rank 2): 35.05,50.8 35.05,0 73.66,0 73.66,50.8
  pour Top (isolate 0.305): 17.53,46.86 17.53,31.88 12.7,31.88 12.7,46.86
  pour Top (isolate 0.305): 17.53,18.92 17.53,3.94 12.7,3.94 12.7,18.92
H2  (via drill 2.2 pad 4)
  other vias: 71.12,48.26
I2C_CL
  Top 0.254: IC1.25 55,19.61 56.04,18.57 56.04,16.86 57.66,15.24 57.66,14.31 R35.1 57.66,14.44 57.66,6.86 56.9,6.1 R57.1
I2C_DA
  Top 0.254: IC1.26 55.79,19.61 56.67,18.73 56.67,17.02 58.9,14.8 58.9,12.83 | 58.9,12.83 R34.1 | R25.1 58.74,11.3 58.9,11.34 58.9,12.83
IN_LA
  Top 0.254: IC1.8 45.71,29.6 45.47,29.84 45.47,30.35 45.21,30.61 43.56,30.61 43.05,31.11 43.05,34.16 42.29,34.92 R3.2
IN_LB
  Top 0.254: IC1.4 45.73,32.75 44.45,34.04 44.45,38.73 43.81,39.37 40.39,39.37 40.01,39.75 40.01,44.45 R5.2
IN_RA
  Top 0.254: IC1.19 50.28,20.43 48.26,18.41 48.26,16.89 47.62,16.26 43.81,16.26 43.18,15.62 43.18,9.78 41.66,8.26 R15.2
IN_RB
  Top 0.254: IC1.9 44.18,28.82 43.05,27.69 41.91,27.69 41.53,27.3 41.53,25.02 41.4,24.89 R17.2
MISO  (via drill 0.4)
  Top 0.254: 43.04,25.41 v43.05,25.4 43.29,25.16 45.23,25.16 45.73,25.67 IC1.13
  Bottom 0.254: P_SPI1.4 42.67,9.14 42.67,25.02 v43.05,25.4
  Bottom 0.406: P_SPI1.4 P_SPI2.4
MOSI  (via drill 0.4)
  Top 0.254: IC1.12 45.43,26.45 v44.96,26.04
  Bottom 0.254: v44.96,26.04 43.18,24.26 43.18,11.18 P_SPI1.3
  Bottom 0.406: P_SPI1.3 P_SPI2.3
N$1  (via drill 0.4)
  Top 0.254: IC4.5 36.5,36.37 37.94,34.92 v38.1,34.92 R3.1
  Bottom 0.254: v38.1,34.92 R12.1
N$2  (via drill 0.4)
  Top 0.254: IC5.10 36.42,13.43 v36.83,13.84 37.97,14.99 38.73,14.99 41.91,18.16 41.91,20.45 43.05,21.59 R18.1
  Bottom 0.254: R59.2 36.79,13.93 v36.83,13.84 R13.2
N$3  (via drill 0.4)
  Top 0.254: IC4.11 36.27,42.37 v38.1,44.2 R11.1
  Bottom 0.254: v38.1,44.2 R11.1
N$4  (via drill 0.4)
  Top 0.254: R16.1 v38.1,10.16 37.37,9.43 IC5.6
  Bottom 0.254: v38.1,10.16 R58.2 36.83,10.12 R14.2
N$5  (via drill 0.4)
  Top 0.254: IC4.8 35.56,39.37 v36.2,38.73 R10.1
  Bottom 0.254: v36.2,38.73 R10.1
N$6  (via drill 0.4)
  Top 0.254: IC4.9 35.92,40.37 v36.2,40.39 36.45,40.64 R8.1
  Bottom 0.254: v36.2,40.39 36.45,40.64 R9.1
N$7  (via drill 0.4)
  Top 0.254: IC4.6 37.56,37.37 v38.1,36.83 R4.1
  Bottom 0.254: v38.1,36.83 R60.2 36.83,36.74 R2.1
N$8  (via drill 0.4)
  Top 0.305: IC1.23 53.43,20.01 v53.26,19.84
  Bottom 0.254: C12.2 53.26,20.62 v53.26,19.84 53.17,19.75 Q1.Q$1
N$9  (via drill 0.4)
  Top 0.305: IC1.24 54.22,18.68 v55.26,17.64
  Bottom 0.254: v55.26,17.64 55.46,17.64 Q1.Q$2 55.6,17.78 56.77,17.78 57.18,18.19 C13.2
N$10  (via drill 2.2 pad 4)
  other vias: 2.54,48.26
N$11  (via drill 0.4)
  Top 0.254: IC5.5 37.8,8.43 v38.1,8.26 R24.1
  Bottom 0.254: v38.1,8.26 R24.1
N$12  (via drill 0.4)
  Top 0.254: IC4.10 36.16,41.37 37.34,42.55 v38.1,42.55 R6.1
  Bottom 0.254: v38.1,42.55 R61.2 36.83,42.76 R1.1
N$13  (via drill 0.4)
  Top 0.254: IC5.11 36.27,14.43 37.34,15.49 38.48,15.49 41.27,18.29 v41.27,21.59 R17.1
  Bottom 0.254: v41.27,21.59 41.15,21.59 R23.1
N$14
  Bottom 0.254: R14.1 36.83,5.71 36.58,5.46 35.43,5.46 35.18,5.71 LED1.C
N$15  (via drill 0.4)
  Top 0.254: R22.1 v38.1,12.06 37.47,11.43 IC5.8
  Bottom 0.254: v38.1,12.06 R22.1
N$16  (via drill 0.4)
  Top 0.254: IC5.9 36.56,12.43 v38.1,13.97 R21.1
  Bottom 0.254: v38.1,13.97 R21.1
N$17  (via drill 2.2 pad 4)
  other vias: 2.54,2.54
N$18
  Top 0.254: PG2_CON.1 50.16,1.65 58.8,1.65 59.44,2.29 R72.2
N$19
  Top 0.254: ADC.3 55.56,43.5 R40.2
N$20
  Bottom 0.254: R13.1 36.7,16.13 35.18,16.13 LED2.C
N$21
  Bottom 0.254: LED.A R36.2
N$22
  Bottom 0.254: R26.2 J9.1
N$23
  Bottom 0.254: R27.2 J10.1
N$24
  Bottom 0.254: R28.2 J11.1
N$25
  Bottom 0.254: R29.2 J12.1
N$26
  Bottom 0.254: R30.2 J13.1
N$27
  Bottom 0.254: R31.2 J14.1
N$28
  Bottom 0.254: R32.2 J15.1
N$29
  Bottom 0.254: R33.2 J16.1
N$30
  Top 0.254: USART1.4 52.45,7.75 R41.2
N$31
  Top 0.254: USART1.3 52.45,9.53 R42.2
N$32
  Top 0.254: R43.2 48.9,41.91 USART0.4
N$33
  Top 0.254: USART0.3 44.2,43.81 R44.2
N$34
  Top 0.254: ADC.4 53.98,43.18 R39.2
N$35
  Top 0.254: USART1.5 53.72,3.17 R48.2
N$36
  Top 0.254: R47.2 42.32,29.75 STOP_BUTTON.1
N$37
  Bottom 0.254: R2.2 36.83,33.15 35.18,33.15 LED3.C
N$38
  Bottom 0.254: R1.2 36.83,46.86 36.58,47.12 35.56,47.12 35.31,46.86 LED4.C
N$39
  Bottom 0.254: IC3.15 63.72,7.87 R49.2
N$40
  Top 0.254: R73.2 39.37,26.67 38.99,27.05 PB0_CON.1
N$41
  Bottom 0.254: IC3.14 62.4,9.14 R50.2
N$42
  Bottom 0.254: IC3.13 R51.2
N$43
  Bottom 0.254: IC3.12 62.27,11.68 R52.2
N$44
  Bottom 0.254: IC3.11 61.98,12.95 62.1,13.08 64.1,13.08 R53.2
N$45
  Bottom 0.254: IC3.10 62.78,14.22 R54.2
N$46
  Bottom 0.254: IC3.9 60.86,16.15 62.1,17.4 62.83,17.4 R55.2
N$47
  Bottom 0.254: IC3.7 56.29,14.22 57.28,15.21 57.28,17.3 60.67,20.7 R56.2
N$48
  Bottom 0.254: R56.1 62.95,21.04 P_SERVA_PWM.8
N$49
  Bottom 0.254: R55.1 63.59,19.14 P_SERVA_PWM.7
N$50
  Bottom 0.254: R54.1 63.33,15.84 66.04,18.54 P_SERVA_PWM.6
N$51
  Bottom 0.254: R53.1 64.6,15.07 P_SERVA_PWM.5
N$52
  Bottom 0.254: R52.1 64.9,12.06 66.04,13.21 P_SERVA_PWM.4
N$53
  Bottom 0.254: R51.1 65.02,10.41 P_SERVA_PWM.3
N$54
  Bottom 0.254: R50.1 P_SERVA_PWM.2
N$55
  Bottom 0.254: R49.1 65.32,5.63 P_SERVA_PWM.1
N$56
  Top 0.254: RESET.3 44.45,19.94 44.83,20.32 R62.2
N$57
  Top 0.254: I2C.3 50.16,9.91 51.44,11.18 52.7,11.18 52.83,11.3 R25.2
N$58
  Top 0.254: ADC.2 57.15,42.55 R69.2
N$59
  Top 0.254: ADC.1 60.33,43.81 58.74,42.23 R70.2
N$60
  Top 0.254: I2C.4 50.8,6.1 R57.2
N$62
  Top 0.254: R45.2 J1.1
N$63  (via drill 2.2 pad 4)
  other vias: 71.12,2.52
N$66
  Top 0.254: Q2.8 4.95,26.54 VCC.P$1 | Q2.7 3.68,25.53 VCC.P$1 | Q2.6 2.41,26.8 VCC.P$1 | Q2.5 1.14,28.07 VCC.P$1 | Q3.5 4.95,24.26 VCC.P$1 | Q3.6 3.68,25.27 VCC.P$1 | Q3.7 2.41,24 VCC.P$1 | Q3.8 1.14,22.73 VCC.P$1
N$67
  Top 0.254: R46.2 J2.1
N$68
  Top 0.254: J3.1 70.1,31.75 69.47,32.38 68.67,32.38 R63.2
N$69
  Top 0.254: R64.2 J4.1
N$70
  Top 0.254: R65.2 J5.1
N$71
  Top 0.254: R66.2 J6.1
N$72
  Top 0.254: R67.2 J7.1
N$73
  Top 0.254: R68.2 J8.1
N$88
  Top 0.406: C14.1 29.08,24
  Top 0.61: 30.99,24 29.08,24 28.19,24 26.8,25.4 D3.C | 30.99,24 31.75,24 IC2.IN | 30.99,24 C5.1
OUTA_1  (via drill 0.5)
  Top 0.406: 19.05,37.37 IC4.25 | 19.05,37.37 19.36,37.37 IC4.OUTA 18.65,32.37 IC4.30 | 19.05,37.37 19.14,37.47 v19.68,37.47 | IC4.1 32.77,32.37 32.77,32.38 v32.26,32.38
  Bottom 0.406: v32.26,32.38 24.89,32.38
  other vias: 21.08,33.66 24.13,33.66 24.13,34.92 24.13,36.2 24.13,37.47 22.61,37.47 22.61,33.66 22.61,34.92 22.61,36.2 21.08,37.47 19.68,36.2 19.68,34.92 19.68,33.66 21.08,34.92 21.08,36.2
  pour Bottom (isolate 0.61, rank 2): 25.4,38.99 25.4,33.02 25.4,32.77 33.02,32.77 33.02,31.75 33.02,30.48 31.75,29.21 31.11,28.57 25.4,28.57 16.51,28.57 16.51,38.99
OUTA_2  (via drill 0.5)
  Top 0.406: 19.78,9.43 IC5.25 | IC5.30 18.65,4.43 IC5.OUTA 20.15,9.43 19.78,9.43 | 19.78,9.43 v19.68,9.53 | IC5.1 32.51,4.43 v32.26,4.45
  Bottom 0.406: v32.26,4.45 24.13,4.45
  other vias: 24.13,5.71 24.13,6.99 24.13,8.26 24.13,9.53 22.61,9.53 22.61,8.26 22.61,6.99 22.61,5.71 21.08,5.71 21.08,6.99 21.08,8.26 21.08,9.53 19.68,8.26 19.68,6.99 19.68,5.71
  pour Bottom (isolate 0.61, rank 2): 25.4,11.05 25.53,4.83 33.02,4.83 33.02,2.54 35.56,0 16.51,0 13.97,0 16.51,2.54 16.51,11.05
OUTB_1  (via drill 0.5)
  Top 0.406: IC4.16 18.65,46.37 IC4.OUTB 20.15,41.37 | IC4.21 20.15,41.37 | v19.68,41.27 19.23,41.27 20.15,41.37 | IC4.15 32.51,46.37 v32.26,46.35
  Bottom 0.406: v32.26,46.35 24.64,46.35 24.64,46.23
  other vias: 21.08,45.09 24.13,45.09 24.13,43.81 24.13,42.55 24.13,41.27 22.61,41.27 21.08,41.27 22.61,45.09 22.61,43.81 22.61,42.55 21.08,43.81 19.68,42.55 19.68,43.81 19.68,45.09 21.08,42.55
  pour Bottom (isolate 0.61): 12.7,50.8 35.56,50.8 35.56,49.53 33.02,46.99 33.02,46.35 25.4,46.35 25.4,39.75 16.51,39.75 16.51,46.99
OUTB_2  (via drill 0.5)
  Top 0.406: IC5.16 18.65,18.43 IC5.OUTB 20.15,13.43 19.78,13.43 | IC5.21 19.78,13.43 | 19.78,13.43 v19.68,13.34 | IC5.15 32.51,18.43 v32.26,18.41
  Bottom 0.406: v32.26,18.41 24.64,18.41
  other vias: 24.13,15.88 24.13,14.61 24.13,13.34 22.61,13.34 22.61,14.61 22.61,15.88 22.61,17.14 21.08,17.14 19.68,17.14 19.68,15.88 19.68,14.61 21.08,15.88 21.08,14.61 21.08,13.34 24.13,17.14
  pour Bottom (isolate 0.61): 16.51,22.23 31.11,22.23 33.02,20.32 33.02,17.78 25.4,17.78 25.4,11.81 16.51,11.81
PB0
  Top 0.254: IC1.10 44.54,28.03 43.18,26.67 R73.1
PG2
  Top 0.254: IC1.43 61.66,31.18 60.96,30.48 60.96,22.86 61.98,21.84 61.98,16.76 61.47,16.26 61.47,7.87 59.44,5.84 R72.1
PWM_1
  Top 0.254: IC1.17 48.7,20.51 48.51,20.32 R62.1
PWM_L
  Top 0.254: R7.2 40.07,38.73 40.39,38.42 40.39,33.53 40.01,33.15 37.97,33.15 37.59,32.77 37.59,23.62 38.1,23.11 44.83,23.11 45.81,24.09 IC1.15
PWM_R  (1 unrouted)
  Top 0.254: R19.2 41.4,12.06 42.16,12.83 42.16,16.38 43.18,17.4 43.18,19.56 45.34,21.72 45.34,22.48 46.15,23.29 IC1.16
RESET
  Top 0.254: IC1.20 51.07,19.57 RESET.1
RXD
  Top 0.254: IC1.2 45.68,34.33 45.47,34.54 45.47,41.87 R43.1
RXD1
  Top 0.254: R42.1 59.12,9.53 59.53,9.94 59.53,14.95 57.31,17.18 57.31,18.89 56.58,19.62 IC1.27
SA0  (via drill 0.4)
  Top 0.254: IC1.30 58.94,18.4 v59.18,18.16
  Bottom 0.254: IC3.3 56.52,9.14 57.91,10.54 57.91,16.89 v59.18,18.16
SA1  (via drill 0.4)
  Top 0.254: IC1.31 59.73,19.01 60.2,18.54 v60.2,17.91
  Bottom 0.254: IC3.2 56.52,7.87 58.55,9.91 58.55,16.26 v60.2,17.91
SA2  (via drill 0.4)
  Top 0.254: IC1.32 60.52,19.49 61.21,18.8 v61.21,18.16
  Bottom 0.254: IC3.1 56.52,6.6 59.18,9.27 59.18,15.75 61.21,17.78 v61.21,18.16
SCK  (via drill 0.4)
  Top 0.254: IC1.11 44.9,27.24 v43.81,26.16
  Bottom 0.254: v43.81,26.16 42.67,26.16 42.16,25.65 42.16,7.11 P_SPI1.5
  Bottom 0.406: P_SPI1.5 P_SPI2.5
SEN  (via drill 0.4)
  Top 0.254: IC1.7 47.59,30.39 48.01,29.97 48.01,24.64 v48.23,24.48
  Bottom 0.254: v48.23,24.48 48.26,24.38 48.26,17.27 48.77,16.76 52.32,16.76 53.34,15.75 53.34,13.34 53.72,12.95 IC3.6
SERVA_VCC
  Top 1.422: P_SERVA_VCC_OUT.1 P_SERVA_VCC_OUT.8 68.58,5.12 arc-45 67.84,3.32 67.56,3.17 arc45 66.05,2.55 VCC1.P$1
  Bottom 1.422: P_SERVA_VCC_OUT.1 P_SERVA_VCC_OUT.2 P_SERVA_VCC_OUT.3 P_SERVA_VCC_OUT.4 P_SERVA_VCC_OUT.5 P_SERVA_VCC_OUT.6 P_SERVA_VCC_OUT.7 P_SERVA_VCC_OUT.8
SPI_SEL1
  Top 0.254: IC1.34 63.54,24.09 63.88,23.75 63.88,16.89 62.74,15.75 62.74,6.86 61.34,5.46 61.34,3.17 59.31,1.14 48.13,1.14 P_SPI2.6
SPI_SEL2
  Top 0.254: P_SPI1.6 45.72,3.56 50.16,3.56 51.56,2.16 56.52,2.16 58.55,4.19 60.2,4.19 60.71,4.7 60.71,5.97 62.1,7.37 62.1,16 62.61,16.51 62.61,23.3 IC1.33
STOP
  Top 0.254: IC1.6 45.4,31.18 45.13,31.45 R47.1
TXD
  Top 0.254: IC1.3 45.71,33.54 44.96,34.29 44.96,39.5 44.07,40.39 R44.1
TXD1
  Top 0.254: R41.1 59.15,7.75 60.29,8.89 60.29,15.11 57.78,17.62 57.78,19.37 57.37,19.79 IC1.28
USART1_PIN
  Top 0.254: IC1.29 58.15,19.95 58.42,19.68 58.42,17.78 60.93,15.27 60.93,8.48 58.42,5.97 58.42,5.08 56.52,3.17 R48.1
VCC  (via drill 0.5)  (2 unrouted)
  Top 0.254: R37.1 37.21,45.97 35.61,44.37 IC4.13
  Top 0.406: IC4.VCC 29.4,44.37 IC4.13 | IC4.3 29.4,34.37 IC4.VCC | IC4.23 IC4.VCC | IC5.23 IC5.VCC | IC5.3 29.4,6.43 IC5.VCC | IC5.13 29.4,16.43 IC5.VCC
  Top 0.61: 13.97,25.4 D3.A
  other vias: 27.18,15.88 28.57,15.88 30.1,15.88 31.62,15.88 27.18,14.61 28.57,14.61 30.1,14.61 31.62,14.61 27.18,13.34 28.57,13.34 30.1,13.34 31.62,13.34 27.18,12.06 28.57,12.06 30.1,12.06 31.62,12.06 27.18,10.79 28.57,10.79 30.1,10.79 31.62,10.79 27.18,9.53 28.57,9.53 30.1,9.53 31.62,9.53 27.18,8.26 28.57,8.26 30.1,8.26 31.62,8.26 27.18,6.99 28.57,6.99 30.1,6.99 31.62,6.99 27.18,43.81 28.57,43.81 30.1,43.81 31.62,43.81 27.18,42.55 28.57,42.55 30.1,42.55 31.62,42.55 27.18,41.27 28.57,41.27 30.1,41.27 31.62,41.27 27.18,40.01 28.57,40.01 30.1,40.01 31.62,40.01 27.18,38.73 28.57,38.73 30.1,38.73 31.62,38.73 27.18,37.47 28.57,37.47 30.1,37.47 31.62,37.47 27.18,36.2 28.57,36.2 30.1,36.2 31.62,36.2 27.18,34.92 28.57,34.92 30.1,34.92 31.62,34.92
  pour Top (isolate 0.61, rank 2): 33.02,50.67 33.02,26.67 16.51,26.8 16.51,24 33.02,24 33.02,0 0,0 0,50.8
VPP  (via drill 0.4)
  Top 0.406: IC1.64 48.7,36.26 v48.39,35.94
  Top 0.61: GND_ADC1.4 GND_ADC1.3 GND_ADC1.2 GND_ADC1.1
  Bottom 0.406: v48.39,35.94 C7.1
  Bottom 0.61: GND_ADC1.1 52.45,46.35 51.56,45.47 51.56,40.13 50.67,39.24 49.15,39.24 48.39,38.48 v48.39,35.94 48.39,34.04 C8.2 | C8.2 48.51,34.04 | FERITE_BEAD.2 48.3,33.94 C8.2

## Text on the board
Top: v.3 | + | +
Bottom: v.3 | - | -